# Altium PCB Board.PcbDoc (part 3 of 3)
Units mm, origin at the board's own origin, x right, y up, seen from the top; angles counter-clockwise.
Board outline 120 x 89 mm, 2 copper layers (Top Layer, Bottom Layer); 165 components, 194 nets, 816 pads, 265 vias.
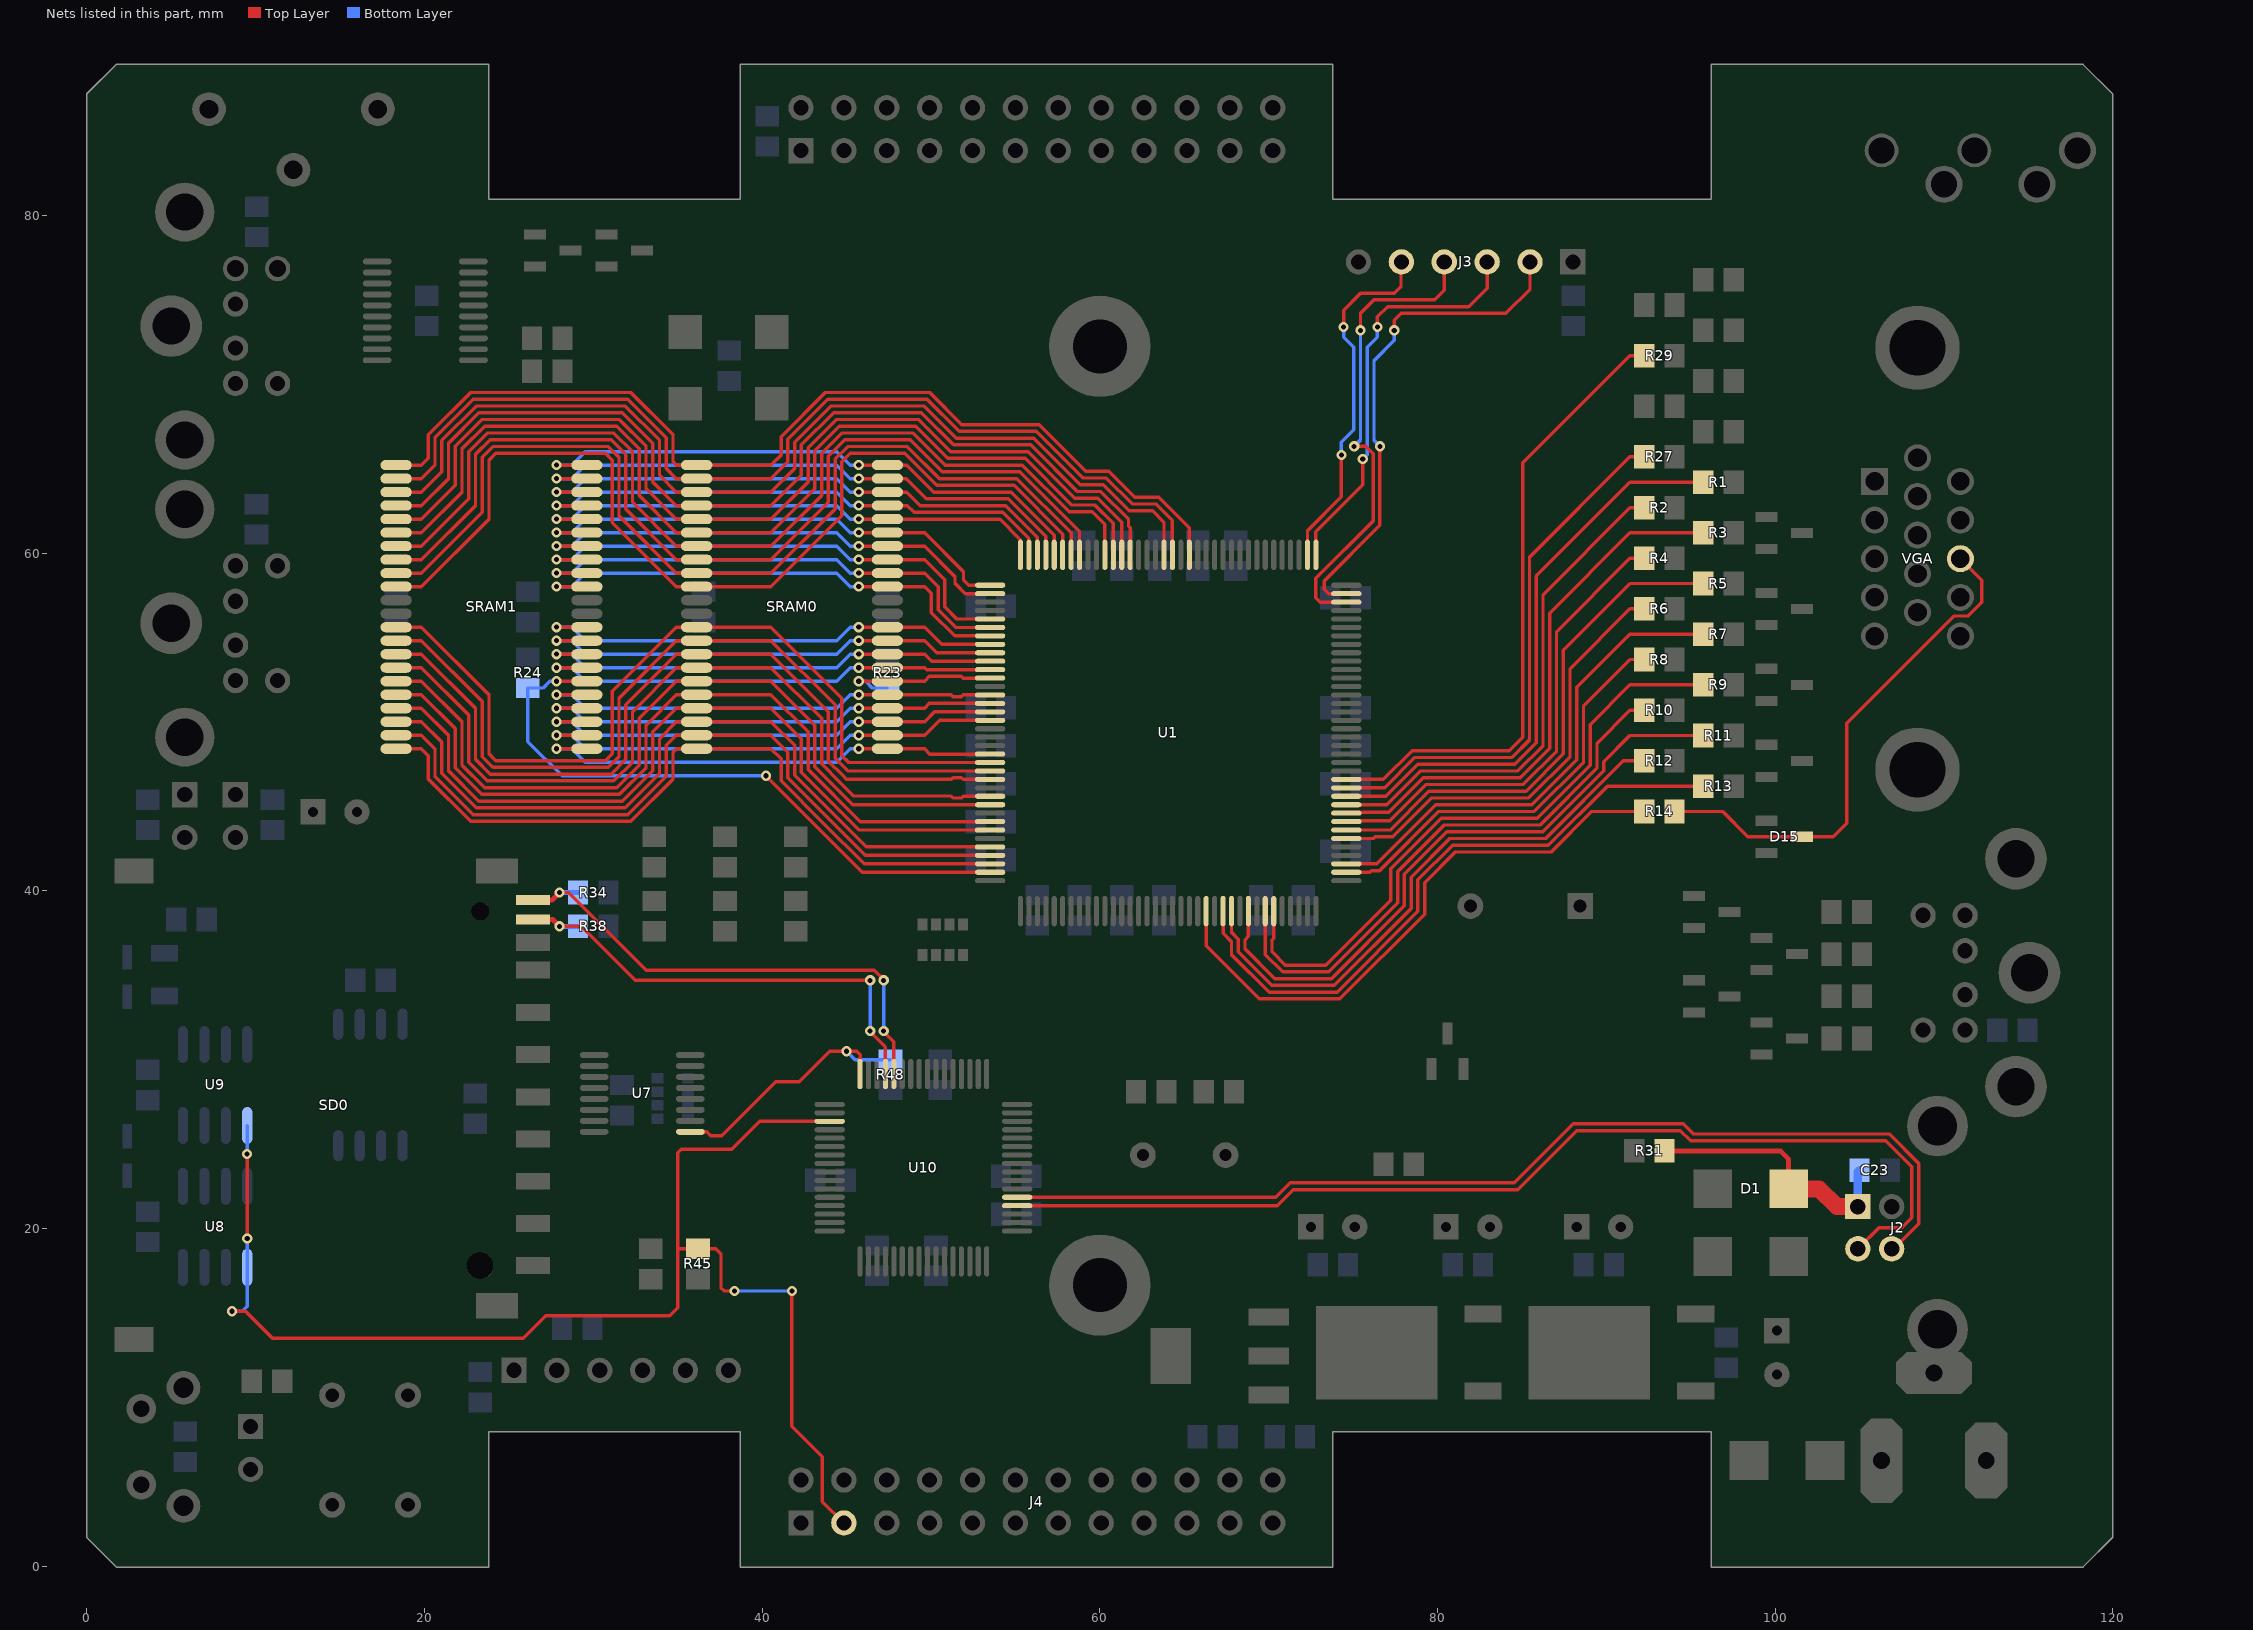
[diagram p3: the nets of this part, all layers, seen from the top]

## Via types
v1: diameter 0.6, hole 0.3, Top Layer to Bottom Layer, tented both sides, 246 vias
v2: diameter 1, hole 0.5, Top Layer to Bottom Layer, tented both sides, 18 vias
v3: diameter 1.5, hole 0.8, Top Layer to Bottom Layer, tented both sides, 1 vias

## Nets (pads, with @x,y where several pads share a name; then routed paths per layer and width w, separated by ;. In a path a pad name is that pad's centre, name@x,y a point inside that pad or via, vN(x,y) a via of type N, cw(c..) or ccw(c..) an arc to the next point about the centre after c; other vN are vias at no path point) (continued)
SDA: J4.3 R45.1 U8.5 U9.5 U10.3 | length 82.5
  Top Layer w0.2: v1(8.6,15.1) 9.4,15.1 11,13.5 25.856,13.5 27.181,14.825 34.525,14.825 35,15.3 35,18.8 ; v1(9.495,24.405) 9.505,24.405 v1(9.505,19.405) ; v1(38.36,16.3) 37.76,16.3 37.56,16.5 37.56,18.5 37.26,18.8 R45.1@36.2,18.8 35,18.8 ; v1(41.76,16.3) 41.76,8.3 43.57,6.49 43.57,3.83 J4.3@44.84,2.56 ; U10.3@44,26.35 39.85,26.35 38.2,24.7 35.2,24.7 35,24.5 35,18.8
  Bottom Layer w0.2: v1(8.6,15.1) 9.2,15.1 9.505,15.405 U8.5@9.505,17.7 v1(9.505,19.405) ; v1(9.495,24.405) 9.505,24.415 U9.5@9.505,26.1 ; v1(38.36,16.3) v1(41.76,16.3)
SDCD: R38.2 SD0.10 U10.61 | length 28.5
  Top Layer w0.2: v1(28,37.9) 29.29,37.9 32.49,34.7 v1(46.4,34.7) ; v1(46.4,31.7) 46.4,31.651 47.3,30.751 U10.61@47.3,29.15
  Top Layer w0.3: SD0.10@26.425,38.3 27.6,38.3 v1(28,37.9)
  Bottom Layer w0.2: v1(46.4,31.7) v1(46.4,34.7)
  Bottom Layer w0.3: v1(28,37.9) R38.2@29.1,37.9
SDWP: R34.2 SD0.11 U10.60 | length 30
  Top Layer w0.2: v1(28,39.9) 28.54,39.9 33.14,35.3 46.649,35.3 47.2,34.749 v1(47.2,34.7) ; v1(47.2,31.7) 47.2,31.651 47.8,31.051 U10.60@47.8,29.15
  Top Layer w0.3: SD0.11@26.425,39.45 27.55,39.45 v1(28,39.9)
  Bottom Layer w0.2: v1(47.2,31.7) v1(47.2,34.7)
  Bottom Layer w0.3: v1(28,39.9) R34.2@29.1,39.9
SOUND_L: R27.1 U1.84 | length 32.2
  Top Layer w0.2: U1.84@74.65,46.05 U1.84@74.6,46.1 76.866,46.1 78.666,47.9 84.416,47.9 85.45,48.934 85.45,59.759 91.39,65.7 R27.1@92.24,65.7
SOUND_R: R29.1 U1.85 | length 37.6
  Top Layer w0.2: U1.85@74.6,46.6 76.8,46.6 78.5,48.3 84.25,48.3 85.05,49.1 85.05,65.359 91.39,71.7 R29.1@92.24,71.7
SPI_MUX: R48.2 U7.1 U10.64 | length 16.3
  Top Layer w0.2: U7.1@35.75,25.725 36.729,25.725 36.951,25.502 37.602,25.502 40.8,28.7 42.2,28.7 44,30.5 v1(45,30.5) 45.6,30.5 45.8,30.3 U10.64@45.8,29.15
  Bottom Layer w0.2: v1(45,30.5) 45.5,30 R48.2@47.6,30
SRAM_A0: SRAM0.5 SRAM1.5 U1.14 | length 28.2
  Top Layer w0.2: v1(27.823,51.614) SRAM1.5@29.623,51.614 ; v1(45.723,51.614) SRAM0.5@47.423,51.614 51.187,51.614 51.301,51.5 51.799,51.5 51.913,51.614 53.486,51.614 U1.14@53.5,51.6
  Bottom Layer w0.2: v1(27.823,51.614) 28.723,51.614 29.523,50.814 44.423,50.814 45.223,51.614 v1(45.723,51.614)
SRAM_A1: SRAM0.4 SRAM1.4 U1.15 | length 28.3
  Top Layer w0.2: v1(27.823,50.814) SRAM1.4@29.623,50.814 ; v1(45.723,50.814) SRAM0.4@47.423,50.814 49.623,50.814 49.909,51.1 U1.15@53.5,51.1
  Bottom Layer w0.2: v1(27.823,50.814) 28.723,50.814 29.523,50.014 44.423,50.014 45.223,50.814 v1(45.723,50.814)
SRAM_A2: SRAM0.3 SRAM1.3 U1.16 | length 28.4
  Top Layer w0.2: v1(27.823,50.014) SRAM1.3@29.623,50.014 ; v1(45.723,50.014) SRAM0.3@47.423,50.014 49.623,50.014 50.209,50.6 U1.16@53.5,50.6
  Bottom Layer w0.2: v1(27.823,50.014) 28.723,50.014 29.523,49.214 44.423,49.214 45.223,50.014 v1(45.723,50.014)
SRAM_A3: SRAM0.2 SRAM1.2 U1.17 | length 28.5
  Top Layer w0.2: v1(27.823,49.214) SRAM1.2@29.623,49.214 ; v1(45.723,49.214) SRAM0.2@47.423,49.214 49.623,49.214 50.509,50.1 U1.17@53.5,50.1
  Bottom Layer w0.2: v1(27.823,49.214) 28.723,49.214 29.523,48.414 44.423,48.414 45.223,49.214 v1(45.723,49.214)
SRAM_A4: SRAM0.1 SRAM1.1 U1.21 | length 28.3
  Top Layer w0.2: v1(27.823,48.414) SRAM1.1@29.623,48.414 ; v1(45.723,48.414) SRAM0.1@47.423,48.414 49.623,48.414 49.937,48.1 U1.21@53.5,48.1
  Bottom Layer w0.2: v1(27.823,48.414) 28.723,48.414 29.523,47.614 44.423,47.614 45.223,48.414 v1(45.723,48.414)
SRAM_A5: SRAM0.44 SRAM1.44 U1.34 | length 44.1
  Top Layer w0.2: SRAM1.44@18.323,48.414 19.823,48.414 20.223,48.014 20.223,46.623 22.732,44.114 29.888,44.114 32.214,44.114 34.723,46.623 34.723,48.214 34.923,48.414 SRAM0.44@36.123,48.414 40.523,48.414 41.123,47.814 41.123,47.414 41.123,46.523 43.632,44.014 46.046,41.6 U1.34@53.5,41.6
SRAM_A6: SRAM0.43 SRAM1.43 U1.33 | length 44.9
  Top Layer w0.2: SRAM1.43@18.323,49.214 19.823,49.214 20.623,48.414 20.623,46.789 22.897,44.514 29.723,44.514 32.048,44.514 34.323,46.789 34.323,48.614 34.923,49.214 SRAM0.43@36.123,49.214 40.523,49.214 41.523,48.214 41.523,47.714 41.523,46.689 46.112,42.1 U1.33@53.5,42.1
SRAM_A7: SRAM0.42 SRAM1.42 U1.32 | length 45.8
  Top Layer w0.2: SRAM1.42@18.323,50.014 19.823,50.014 21.023,48.814 21.023,46.954 23.063,44.914 29.523,44.914 31.883,44.914 33.923,46.954 33.923,49.014 34.923,50.014 SRAM0.42@36.123,50.014 40.523,50.014 41.923,48.614 41.923,48.114 41.923,46.854 46.177,42.6 U1.32@53.5,42.6
SRAM_A8: SRAM0.28 SRAM1.28 U1.133 | length 59
  Top Layer w0.2: SRAM1.28@18.323,61.214 19.823,61.214 22.223,63.614 22.223,66.177 23.56,67.514 31.386,67.514 32.723,66.177 32.723,63.414 34.923,61.214 SRAM0.28@36.123,61.214 40.523,61.214 43.123,63.814 43.123,66.077 44.56,67.514 49.102,67.514 51.002,65.614 55.582,65.614 58.346,62.85 59.714,62.85 60.8,61.764 U1.133@60.8,59.9
SRAM_A9: SRAM0.27 SRAM1.27 U1.132 | length 58.8
  Top Layer w0.2: SRAM1.27@18.323,62.014 19.823,62.014 21.823,64.014 21.823,66.343 23.394,67.914 31.551,67.914 33.123,66.343 33.123,65.814 33.123,63.814 34.923,62.014 40.523,62.014 42.723,64.214 42.723,66.243 44.394,67.914 49.268,67.914 51.168,66.014 55.747,66.014 58.512,63.25 59.88,63.25 61.3,61.83 U1.132@61.3,59.9
SRAM_A10: SRAM0.26 SRAM1.26 U1.131 | length 58.6
  Top Layer w0.2: SRAM1.26@18.323,62.814 19.823,62.814 21.423,64.414 21.423,66.508 23.229,68.314 31.717,68.314 33.523,66.508 33.523,64.214 34.923,62.814 SRAM0.26@36.123,62.814 40.523,62.814 42.323,64.614 42.323,66.408 44.229,68.314 49.434,68.314 51.334,66.414 55.913,66.414 58.677,63.65 60.046,63.65 61.7,61.996 61.7,61.601 61.8,61.501 U1.131@61.8,59.9
SRAM_A11: SRAM0.25 SRAM1.25 U1.127 | length 59.8
  Top Layer w0.2: SRAM1.25@18.323,63.614 19.823,63.614 21.023,64.814 21.023,66.674 23.063,68.714 28.223,68.714 31.883,68.714 33.923,66.674 33.923,64.614 34.923,63.614 SRAM0.25@36.123,63.614 40.523,63.614 41.923,65.014 41.923,66.574 44.063,68.714 49.599,68.714 51.499,66.814 56.079,66.814 58.843,64.05 60.211,64.05 61.747,62.514 63.123,62.514 63.8,61.837 U1.127@63.8,59.9
SRAM_A12: SRAM0.24 SRAM1.24 U1.126 | length 59.6
  Top Layer w0.2: SRAM1.24@18.323,64.414 19.823,64.414 20.623,65.214 20.623,66.84 22.897,69.114 32.048,69.114 34.323,66.84 34.323,65.814 34.323,65.014 34.923,64.414 SRAM0.24@36.123,64.414 40.523,64.414 41.523,65.414 41.523,66.74 43.897,69.114 49.765,69.114 51.665,67.214 56.244,67.214 59.009,64.45 60.377,64.45 61.913,62.914 63.323,62.914 64.3,61.937 U1.126@64.3,59.9
SRAM_A13: SRAM0.23 SRAM1.23 U1.124 | length 59.6
  Top Layer w0.2: SRAM1.23@18.323,65.214 19.823,65.214 20.223,65.614 20.223,65.914 20.223,67.005 22.732,69.514 32.214,69.514 34.723,67.005 34.723,65.414 34.923,65.214 SRAM0.23@36.123,65.214 40.523,65.214 41.123,65.814 41.123,66.905 43.732,69.514 48.142,69.514 49.931,69.514 51.831,67.614 56.41,67.614 59.174,64.85 60.543,64.85 62.078,63.314 63.488,63.314 65.3,61.503 U1.124@65.3,59.9
SRAM_A14: SRAM0.22 SRAM1.22 U1.140 | length 34.8
  Top Layer w0.2: v1(27.823,65.214) SRAM1.22@29.623,65.214 ; v1(45.723,65.214) SRAM0.22@47.423,65.214 48.574,65.214 50.174,63.614 54.753,63.614 57.3,61.067 U1.140@57.3,59.9
  Bottom Layer w0.2: v1(27.823,65.214) 28.723,65.214 29.523,66.014 44.423,66.014 45.223,65.214 v1(45.723,65.214)
SRAM_A15: SRAM0.21 SRAM1.21 U1.141 | length 34
  Top Layer w0.2: v1(27.823,64.414) SRAM1.21@29.623,64.414 ; v1(45.723,64.414) SRAM0.21@47.423,64.414 48.532,64.414 49.732,63.214 54.588,63.214 56.8,61.002 U1.141@56.8,59.9
  Bottom Layer w0.2: v1(27.823,64.414) 28.723,64.414 29.523,65.214 44.423,65.214 45.223,64.414 v1(45.723,64.414)
SRAM_A16: SRAM0.20 SRAM1.20 U1.142 | length 33.1
  Top Layer w0.2: v1(27.823,63.614) SRAM1.20@29.623,63.614 ; v1(45.723,63.614) SRAM0.20@47.423,63.614 48.57,63.614 49.37,62.814 54.422,62.814 56.3,60.936 U1.142@56.3,59.9
  Bottom Layer w0.2: v1(27.823,63.614) 28.723,63.614 29.523,64.414 44.423,64.414 45.223,63.614 v1(45.723,63.614)
SRAM_A17: SRAM0.19 SRAM1.19 U1.143 | length 32.2
  Top Layer w0.2: v1(27.823,62.814) SRAM1.19@29.623,62.814 ; v1(45.723,62.814) SRAM0.19@47.423,62.814 48.608,62.814 49.008,62.414 54.256,62.414 55.8,60.87 U1.143@55.8,59.9
  Bottom Layer w0.2: v1(27.823,62.814) 28.723,62.814 29.523,63.614 44.423,63.614 45.223,62.814 v1(45.723,62.814)
SRAM_A18: SRAM0.18 SRAM1.18 U1.144 | length 31.3
  Top Layer w0.2: v1(27.823,62.014) SRAM1.18@29.623,62.014 ; v1(45.723,62.014) SRAM0.18@47.423,62.014 54.091,62.014 55.3,60.805 U1.144@55.3,59.9
  Bottom Layer w0.2: v1(27.823,62.014) 28.723,62.014 29.523,62.814 44.423,62.814 45.223,62.014 v1(45.723,62.014)
SRAM_CE0: R23.2 SRAM0.6 U1.12 | length 9.8
  Top Layer w0.2: v1(45.723,52.414) SRAM0.6@47.423,52.414 49.623,52.414 49.909,52.7 51.799,52.7 51.899,52.6 U1.12@53.5,52.6
  Bottom Layer w0.2: v1(45.723,52.414) 46.123,52.414 46.523,52.014 R23.2@47.423,52.014
SRAM_CE1: R24.2 SRAM1.6 U1.35 | length 37.4
  Top Layer w0.2: v1(27.823,52.414) SRAM1.6@29.623,52.414 ; v1(40.223,46.814) 43.423,43.614 45.937,41.1 U1.35@53.5,41.1
  Bottom Layer w0.2: v1(27.823,52.414) 27.423,52.414 27.023,52.014 R24.2@26.123,52.014 26.123,48.842 28.15,46.814 v1(40.223,46.814)
SRAM_D0: SRAM0.7 SRAM1.7 U1.11 | length 28.2
  Top Layer w0.2: v1(27.823,53.214) SRAM1.7@29.623,53.214 ; v1(45.723,53.214) SRAM0.7@47.423,53.214 49.623,53.214 49.737,53.1 U1.11@53.5,53.1
  Bottom Layer w0.2: v1(27.823,53.214) 28.723,53.214 29.523,52.414 44.423,52.414 45.223,53.214 v1(45.723,53.214)
SRAM_D1: SRAM0.8 SRAM1.8 U1.10 | length 28.3
  Top Layer w0.2: v1(27.823,54.014) SRAM1.8@29.623,54.014 ; v1(45.723,54.014) SRAM0.8@47.423,54.014 49.623,54.014 50.037,53.6 U1.10@53.5,53.6
  Bottom Layer w0.2: v1(27.823,54.014) 28.723,54.014 29.523,53.214 44.423,53.214 45.223,54.014 v1(45.723,54.014)
SRAM_D2: SRAM0.9 SRAM1.9 U1.9 | length 28.4
  Top Layer w0.2: v1(27.823,54.814) SRAM1.9@29.623,54.814 ; v1(45.723,54.814) SRAM0.9@47.423,54.814 49.623,54.814 50.337,54.1 U1.9@53.5,54.1
  Bottom Layer w0.2: v1(27.823,54.814) 28.723,54.814 29.523,54.014 44.423,54.014 45.223,54.814 v1(45.723,54.814)
SRAM_D3: SRAM0.10 SRAM1.10 U1.8 | length 28.6
  Top Layer w0.2: v1(27.823,55.614) SRAM1.10@29.623,55.614 ; v1(45.723,55.614) SRAM0.10@47.423,55.614 49.623,55.614 50.637,54.6 U1.8@53.5,54.6
  Bottom Layer w0.2: v1(27.823,55.614) 28.723,55.614 29.523,54.814 44.423,54.814 45.223,55.614 v1(45.723,55.614)
SRAM_D4: SRAM0.13 SRAM1.13 U1.7 | length 30
  Top Layer w0.2: v1(27.823,58.014) SRAM1.13@29.623,58.014 ; v1(45.723,58.014) SRAM0.13@47.423,58.014 49.623,58.014 50.023,57.614 50.023,56.483 51.406,55.1 U1.7@53.5,55.1
  Bottom Layer w0.2: v1(27.823,58.014) 28.723,58.014 29.523,58.814 44.423,58.814 45.223,58.014 v1(45.723,58.014)
SRAM_D5: SRAM0.14 SRAM1.14 U1.6 | length 30.3
  Top Layer w0.2: v1(27.823,58.814) SRAM1.14@29.623,58.814 ; v1(45.723,58.814) SRAM0.14@47.423,58.814 49.623,58.814 50.423,58.014 50.423,56.649 51.471,55.6 U1.6@53.5,55.6
  Bottom Layer w0.2: v1(27.823,58.814) 28.723,58.814 29.523,59.614 44.423,59.614 45.223,58.814 v1(45.723,58.814)
SRAM_D6: SRAM0.15 SRAM1.15 U1.5 | length 30.5
  Top Layer w0.2: v1(27.823,59.614) SRAM1.15@29.623,59.614 ; v1(45.723,59.614) SRAM0.15@47.423,59.614 49.623,59.614 50.823,58.414 50.823,56.814 51.537,56.1 U1.5@53.5,56.1
  Bottom Layer w0.2: v1(27.823,59.614) 28.723,59.614 29.523,60.414 44.423,60.414 45.223,59.614 v1(45.723,59.614)
SRAM_D7: SRAM0.16 SRAM1.16 U1.2 | length 29.5
  Top Layer w0.2: v1(27.823,60.414) SRAM1.16@29.623,60.414 ; v1(45.723,60.414) SRAM0.16@47.423,60.414 49.623,60.414 51.423,58.614 51.423,58.214 52.037,57.6 U1.2@53.5,57.6
  Bottom Layer w0.2: v1(27.823,60.414) 28.723,60.414 29.523,61.214 44.423,61.214 45.223,60.414 v1(45.723,60.414)
SRAM_D8: SRAM0.29 SRAM1.29 U1.134 | length 59.2
  Top Layer w0.2: SRAM1.29@18.323,60.414 19.823,60.414 22.623,63.214 22.623,66.011 23.726,67.114 31.22,67.114 32.323,66.011 32.323,63.014 34.923,60.414 SRAM0.29@36.123,60.414 40.523,60.414 43.523,63.414 43.523,65.911 44.726,67.114 48.937,67.114 50.837,65.214 55.416,65.214 58.18,62.45 59.549,62.45 60.3,61.699 U1.134@60.3,59.9
SRAM_D9: SRAM0.30 SRAM1.30 U1.137 | length 58.2
  Top Layer w0.2: SRAM1.30@18.323,59.614 19.823,59.614 23.023,62.814 23.023,65.846 23.891,66.714 31.054,66.714 31.923,65.846 31.923,62.614 34.923,59.614 SRAM0.30@36.123,59.614 40.523,59.614 43.923,63.014 43.923,65.746 44.891,66.714 48.771,66.714 50.671,64.814 55.25,64.814 58.8,61.265 U1.137@58.8,59.9
SRAM_D10: SRAM0.31 SRAM1.31 U1.138 | length 58.4
  Top Layer w0.2: SRAM1.31@18.323,58.814 19.823,58.814 23.423,62.414 23.423,65.68 24.057,66.314 30.888,66.314 31.523,65.68 31.523,63.414 31.523,62.214 34.923,58.814 SRAM0.31@36.123,58.814 40.523,58.814 44.323,62.614 44.323,65.58 45.057,66.314 48.605,66.314 50.505,64.414 55.085,64.414 58.3,61.199 U1.138@58.3,59.9
SRAM_D11: SRAM0.32 SRAM1.32 U1.139 | length 58.6
  Top Layer w0.2: SRAM1.32@18.323,58.014 19.823,58.014 23.823,62.014 23.823,65.514 24.223,65.914 30.723,65.914 31.123,65.514 31.123,61.814 34.923,58.014 SRAM0.32@36.123,58.014 40.523,58.014 44.723,62.214 44.723,65.414 45.223,65.914 48.44,65.914 50.34,64.014 54.919,64.014 57.8,61.133 U1.139@57.8,59.9
SRAM_D12: SRAM0.35 SRAM1.35 U1.22 | length 51.3
  Top Layer w0.2: SRAM1.35@18.323,55.614 19.823,55.614 23.823,51.614 23.823,48.114 24.223,47.714 30.723,47.714 31.123,48.114 31.123,51.814 34.923,55.614 SRAM0.35@36.123,55.614 40.523,55.614 44.723,51.414 44.723,48.014 45.137,47.6 U1.22@53.5,47.6
SRAM_D13: SRAM0.36 SRAM1.36 U1.23 | length 50.4
  Top Layer w0.2: SRAM1.36@18.323,54.814 19.823,54.814 23.423,51.214 23.423,47.949 24.057,47.314 30.888,47.314 31.523,47.949 31.523,51.414 34.923,54.814 SRAM0.36@36.123,54.814 40.523,54.814 44.323,51.014 44.323,47.849 45.071,47.1 U1.23@53.5,47.1
SRAM_D14: SRAM0.37 SRAM1.37 U1.24 | length 49.6
  Top Layer w0.2: SRAM1.37@18.323,54.014 19.823,54.014 23.023,50.814 23.023,47.783 23.891,46.914 31.054,46.914 31.923,47.783 31.923,51.014 34.923,54.014 SRAM0.37@36.123,54.014 40.523,54.014 43.923,50.614 43.923,47.683 44.791,46.814 44.991,46.614 51.216,46.614 51.301,46.7 51.799,46.7 51.899,46.6 U1.24@53.5,46.6
SRAM_D15: SRAM0.38 SRAM1.38 U1.26 | length 48.9
  Top Layer w0.2: SRAM1.38@18.323,53.214 19.823,53.214 22.623,50.414 22.623,47.617 23.726,46.514 28.823,46.514 31.22,46.514 32.323,47.617 32.323,50.614 34.923,53.214 SRAM0.38@36.123,53.214 40.523,53.214 43.523,50.214 43.523,49.614 43.523,47.517 44.626,46.414 ; 44.667,46.373 45.426,45.614 51.187,45.614 51.301,45.5 51.813,45.5 51.913,45.6 U1.26@53.5,45.6
SRAM_LB: SRAM0.39 SRAM1.39 U1.27 | length 48
  Top Layer w0.2: SRAM1.39@18.323,52.414 19.823,52.414 22.223,50.014 22.223,47.452 23.56,46.114 31.386,46.114 32.723,47.452 32.723,50.214 34.923,52.414 SRAM0.39@36.123,52.414 40.523,52.414 43.123,49.814 43.123,49.314 43.123,47.352 45.374,45.1 U1.27@53.5,45.1
SRAM_OE: SRAM0.41 SRAM1.41 U1.30 | length 46.5
  Top Layer w0.2: SRAM1.41@18.323,50.814 19.823,50.814 21.423,49.214 21.423,47.12 23.229,45.314 31.717,45.314 33.523,47.12 33.523,49.414 34.923,50.814 SRAM0.41@36.123,50.814 40.523,50.814 42.323,49.014 42.323,48.414 42.323,47.02 44.129,45.214 45.743,43.6 U1.30@53.5,43.6
SRAM_UB: SRAM0.40 SRAM1.40 U1.29 | length 47.3
  Top Layer w0.2: SRAM1.40@18.323,51.614 19.823,51.614 21.823,49.614 21.823,47.286 23.394,45.714 31.551,45.714 33.123,47.286 33.123,47.714 33.123,49.814 34.923,51.614 SRAM0.40@36.123,51.614 40.523,51.614 42.723,49.414 42.723,48.714 42.723,47.186 45.809,44.1 U1.29@53.5,44.1
SRAM_WE: SRAM0.17 SRAM1.17 U1.1 | length 29.7
  Top Layer w0.2: v1(27.823,61.214) SRAM1.17@29.623,61.214 ; v1(45.723,61.214) SRAM0.17@47.423,61.214 49.623,61.214 51.923,58.914 51.923,58.414 52.237,58.1 U1.1@53.5,58.1
  Bottom Layer w0.2: v1(27.823,61.214) 28.723,61.214 29.523,62.014 44.423,62.014 45.223,61.214 v1(45.723,61.214)
TCK: J3.3 U1.109 | length 24.4
  Top Layer w0.2: U1.109@72.8,59.9 72.8,61.268 75.574,64.042 v1(75.574,65.566) ; v1(76.44,73.4) 76.44,74 77.04,74.6 81.84,74.6 82.94,75.7 J3.3@82.94,77.25
  Bottom Layer w0.2: v1(75.574,65.566) 75.84,65.832 75.84,72.2 76.44,72.8 v1(76.44,73.4)
TDI: J3.5 U1.110 | length 21.3
  Top Layer w0.2: U1.110@72.3,59.9 72.3,61.334 74.304,63.338 v1(74.304,65.82) ; v1(74.44,73.4) 74.44,74.4 75.44,75.4 77.44,75.4 77.84,75.8 77.84,77.23 J3.5@77.86,77.25
  Bottom Layer w0.2: v1(74.304,65.82) 74.304,66.582 75.04,67.318 75.04,72.2 74.44,72.8 v1(74.44,73.4)
TDO: J3.4 U1.106 | length 28.4
  Top Layer w0.2: U1.106@74.6,57.1 73.05,57.1 72.8,57.35 72.8,58.514 76.19,61.904 76.19,65.879 75.741,66.328 v1(75.066,66.328) ; v1(75.44,73.2) 75.44,74.2 76.24,75 79.84,75 80.4,75.56 J3.4@80.4,77.25
  Bottom Layer w0.2: v1(75.066,66.328) 75.44,66.702 v1(75.44,73.2)
TMS: J3.2 U1.107 | length 29.8
  Top Layer w0.2: U1.107@74.6,57.6 73.55,57.6 73.3,57.85 73.3,58.35 76.59,61.64 v1(76.59,66.328) ; v1(77.44,73.2) 77.44,73.8 77.84,74.2 84.04,74.2 85.48,75.64 J3.2@85.48,77.25
  Bottom Layer w0.2: v1(76.59,66.328) 76.24,66.678 76.24,71.4 77.44,72.6 v1(77.44,73.2)
USB_D+: J2.3 U10.37 | length 62
  Top Layer w0.2: U10.37@55.1,21.85 70.419,21.85 71.269,22.7 84.551,22.7 88.051,26.2 94.556,26.2 95.156,25.6 106.75,25.6 108.5,23.85 108.5,20.284 107.016,18.8 J2.3@106.9,18.8
USB_D-: J2.2 U10.36 | length 62.7
  Top Layer w0.2: U10.36@55.1,21.35 70.5,21.35 71.45,22.3 84.75,22.3 88.25,25.8 94.39,25.8 94.99,25.2 106.55,25.2 108.1,23.65 108.1,20.65 107.5,20.05 106.15,20.05 J2.2@104.9,18.8
VBUS: C23.2 D1.1 J2.1 R31.1 | length 16
  Top Layer w0.3: R31.1@93.45,24.6 100.3,24.6 100.8,24.1 D1.1@100.8,22.35
  Top Layer w1: D1.1@100.8,22.35 102.6,22.35 103.65,21.3 J2.1@104.9,21.3
  Bottom Layer w0.5: J2.1@104.9,21.3 104.9,23.35 C23.2@105,23.45
VGA_B0: R12.2 U1.62 | length 34
  Top Layer w0.2: U1.62@67.8,38.8 67.8,37.54 68.2,37.14 68.2,36.39 70.19,34.4 73.887,34.4 78.44,38.953 78.44,40.813 80.727,43.1 86.404,43.1 91.004,47.7 R12.2@92.24,47.7
VGA_B1: R11.2 U1.64 | length 37.6
  Top Layer w0.2: U1.64@68.8,38.8 68.8,37.299 68.6,37.099 68.6,36.556 70.356,34.8 73.722,34.8 78.04,39.118 78.04,40.979 80.561,43.5 86.238,43.5 89.85,47.112 89.85,47.65 91.4,49.2 R11.2@95.74,49.2
VGA_B2: R10.2 U1.66 | length 33.8
  Top Layer w0.2: U1.66@69.8,38.8 69.8,36.224 70.824,35.2 73.556,35.2 77.64,39.284 77.64,41.144 80.396,43.9 86.073,43.9 89.45,47.278 89.45,48.75 91.4,50.7 R10.2@92.24,50.7
VGA_B3: R9.2 U1.67 | length 37.7
  Top Layer w0.2: U1.67@70.3,38.8 70.3,37.199 70.2,37.099 70.2,36.39 70.99,35.6 73.39,35.6 77.24,39.45 77.24,41.31 80.23,44.3 85.907,44.3 89.05,47.444 89.05,49.85 91.4,52.2 R9.2@95.74,52.2
VGA_G0: R8.2 U1.74 | length 24.8
  Top Layer w0.2: U1.74@74.6,41.1 75.99,41.1 76.09,41.2 76.564,41.2 80.064,44.7 85.741,44.7 88.65,47.609 88.65,49.556 88.65,50.95 91.4,53.7 R8.2@92.24,53.7
VGA_G1: R7.2 U1.75 | length 29.3
  Top Layer w0.2: U1.75@74.6,41.6 76.399,41.6 79.899,45.1 85.575,45.1 88.25,47.775 88.25,49.389 88.25,52.05 91.39,55.19 95.731,55.19 R7.2@95.74,55.2
VGA_G2: R6.2 U1.78 | length 26.3
  Top Layer w0.2: U1.78@74.6,43.1 76.201,43.1 76.301,43.2 77.36,43.2 79.66,45.5 85.41,45.5 87.85,47.94 87.85,53.15 91.4,56.7 R6.2@92.24,56.7
VGA_G3: R5.2 U1.79 | length 30.8
  Top Layer w0.2: U1.79@74.6,43.6 77.194,43.6 79.494,45.9 85.244,45.9 87.45,48.106 87.45,54.25 91.4,58.2 R5.2@95.74,58.2
VGA_HS: R13.2 U1.61 | length 37.8
  Top Layer w0.2: U1.61@67.3,38.8 67.3,37.474 67.8,36.974 67.8,36.224 70.024,34 74.053,34 78.84,38.787 78.84,40.647 80.893,42.7 86.57,42.7 90.069,46.2 R13.2@95.74,46.2
VGA_R0: R4.2 U1.80 | length 28.2
  Top Layer w0.2: U1.80@74.6,44.1 74.65,44.15 77.178,44.15 79.328,46.3 85.078,46.3 87.05,48.272 87.05,55.35 91.4,59.7 R4.2@92.24,59.7
VGA_R1: R3.2 U1.81 | length 32.7
  Top Layer w0.2: U1.81@74.6,44.6 74.65,44.65 77.113,44.65 79.163,46.7 84.913,46.7 86.65,48.437 86.65,56.45 91.4,61.2 R3.2@95.74,61.2
VGA_R2: R2.2 U1.82 | length 30.2
  Top Layer w0.2: U1.82@74.6,45.1 76.997,45.1 78.997,47.1 84.747,47.1 86.25,48.603 86.25,57.55 91.4,62.7 R2.2@92.24,62.7
VGA_R3: R1.2 U1.83 | length 34.6
  Top Layer w0.2: U1.83@74.6,45.6 76.931,45.6 78.831,47.5 84.581,47.5 85.85,48.769 85.85,58.65 91.4,64.2 R1.2@95.74,64.2
VGA_VS: R14.2 U1.59 | length 35
  Top Layer w0.2: U1.59@66.3,38.8 66.3,36.751 69.451,33.6 74.219,33.6 79.24,38.621 79.24,40.482 81.058,42.3 86.735,42.3 89.135,44.7 R14.2@92.24,44.7
VSYNC: D15.3 R14.1 VGA.13 | length 31.1
  Top Layer w0.2: R14.1@94.04,44.7 96.881,44.7 98.381,43.2 D15.3@101.59,43.2 103.45,43.2 104.24,43.99 104.24,49.915 110.605,56.28 111.426,56.28 112.24,57.094 112.24,58.4 VGA.13@110.97,59.67
pads on no net: "Gamepad 1.1" "Gamepad 2.1" Audio.4 Audio.5 J5.6 Power.MH R26.1 SD0.0 SD0.8 SD0.9 U1.72 U5.7 U5.9 U5.16 U5.18 U9.7 VGA.4 VGA.9 VGA.11 VGA.12 VGA.15

## Polygon pours and split planes (outlines as drawn)
GND on Bottom Layer "Bottom Layer-No Net" (solid, remove dead copper, pour order 2): -0.022,88.978 -0.022,-0.022 23.778,-0.022 23.778,7.978 38.678,7.978 38.678,-0.022 73.778,-0.022 73.778,7.978 96.178,7.978 96.178,-0.022 119.978,-0.022 119.978,88.978 96.178,88.978 96.178,80.978 73.778,80.978 73.778,88.978 38.678,88.978 38.678,80.978 23.778,80.978 23.778,88.978

## Keep-outs
Keep-Out Layer:
  the board outline again, w0.15

## Other copper
Top Layer:
  region: 73.684,24.934 73.668,24.934 73.668,24.884 73.651,24.884 73.651,24.868 73.634,24.868 73.634,24.834 73.618,24.834 73.618,24.818 73.601,24.818 73.601,24.801 73.568,24.801 73.568,24.784 73.551,24.784 73.551,24.768 73.501,24.768 73.501,24.751 73.368,24.751 73.368,24.768 73.318,24.768 73.318,24.784 73.301,24.784 73.301,24.801 73.268,24.801 73.268,24.818 73.251,24.818 73.251,24.834 73.234,24.834 73.234,24.868 73.218,24.868 73.218,24.884 73.201,24.884 73.201,24.934 73.184,24.934 73.184,25.751 73.684,25.751
  region: 74.684,24.934 74.667,24.934 74.667,24.884 74.651,24.884 74.651,24.868 74.634,24.868 74.634,24.834 74.617,24.834 74.617,24.818 74.601,24.818 74.601,24.801 74.567,24.801 74.567,24.784 74.551,24.784 74.551,24.768 74.501,24.768 74.501,24.751 74.367,24.751 74.367,24.768 74.317,24.768 74.317,24.784 74.301,24.784 74.301,24.801 74.267,24.801 74.267,24.818 74.251,24.818 74.251,24.834 74.234,24.834 74.234,24.868 74.217,24.868 74.217,24.884 74.201,24.884 74.201,24.934 74.184,24.934 74.184,25.751 74.684,25.751
  region: 75.7,24.934 75.683,24.934 75.683,24.884 75.667,24.884 75.667,24.868 75.65,24.868 75.65,24.834 75.633,24.834 75.633,24.818 75.617,24.818 75.617,24.801 75.583,24.801 75.583,24.784 75.567,24.784 75.567,24.768 75.517,24.768 75.517,24.751 75.384,24.751 75.384,24.768 75.334,24.768 75.334,24.784 75.317,24.784 75.317,24.801 75.284,24.801 75.284,24.818 75.267,24.818 75.267,24.834 75.25,24.834 75.25,24.868 75.234,24.868 75.234,24.884 75.217,24.884 75.217,24.934 75.2,24.934 75.2,25.751 75.7,25.751
  region: 76.716,24.934 76.7,24.934 76.7,24.884 76.683,24.884 76.683,24.868 76.666,24.868 76.666,24.834 76.65,24.834 76.65,24.818 76.633,24.818 76.633,24.801 76.6,24.801 76.6,24.784 76.583,24.784 76.583,24.768 76.533,24.768 76.533,24.751 76.4,24.751 76.4,24.768 76.35,24.768 76.35,24.784 76.333,24.784 76.333,24.801 76.3,24.801 76.3,24.818 76.283,24.818 76.283,24.834 76.267,24.834 76.267,24.868 76.25,24.868 76.25,24.884 76.233,24.884 76.233,24.934 76.217,24.934 76.217,25.751 76.716,25.751
  region: 72.518,26.45 71.702,26.45 71.702,26.467 71.652,26.467 71.652,26.484 71.635,26.484 71.635,26.5 71.602,26.5 71.602,26.517 71.585,26.517 71.585,26.534 71.568,26.534 71.568,26.567 71.552,26.567 71.552,26.584 71.535,26.584 71.535,26.634 71.518,26.634 71.518,26.767 71.535,26.767 71.535,26.817 71.552,26.817 71.552,26.833 71.568,26.833 71.568,26.867 71.585,26.867 71.585,26.883 71.602,26.883 71.602,26.9 71.635,26.9 71.635,26.917 71.652,26.917 71.652,26.933 71.702,26.933 71.702,26.95 72.518,26.95
  region: 78.199,26.933 78.249,26.933 78.249,26.917 78.266,26.917 78.266,26.9 78.299,26.9 78.299,26.883 78.316,26.883 78.316,26.867 78.332,26.867 78.332,26.833 78.349,26.833 78.349,26.817 78.366,26.817 78.366,26.767 78.382,26.767 78.382,26.634 78.366,26.634 78.366,26.584 78.349,26.584 78.349,26.567 78.332,26.567 78.332,26.534 78.316,26.534 78.316,26.517 78.299,26.517 78.299,26.5 78.266,26.5 78.266,26.484 78.249,26.484 78.249,26.467 78.199,26.467 78.199,26.45 77.383,26.45 77.383,26.95 78.199,26.95
  region: 72.518,27.467 71.702,27.467 71.702,27.483 71.652,27.483 71.652,27.5 71.635,27.5 71.635,27.517 71.602,27.517 71.602,27.533 71.585,27.533 71.585,27.55 71.568,27.55 71.568,27.583 71.552,27.583 71.552,27.6 71.535,27.6 71.535,27.65 71.518,27.65 71.518,27.783 71.535,27.783 71.535,27.833 71.552,27.833 71.552,27.85 71.568,27.85 71.568,27.883 71.585,27.883 71.585,27.9 71.602,27.9 71.602,27.916 71.635,27.916 71.635,27.933 71.652,27.933 71.652,27.95 71.702,27.95 71.702,27.966 72.518,27.966
  region: 78.199,27.95 78.249,27.95 78.249,27.933 78.266,27.933 78.266,27.916 78.299,27.916 78.299,27.9 78.316,27.9 78.316,27.883 78.332,27.883 78.332,27.85 78.349,27.85 78.349,27.833 78.366,27.833 78.366,27.783 78.382,27.783 78.382,27.65 78.366,27.65 78.366,27.6 78.349,27.6 78.349,27.583 78.332,27.583 78.332,27.55 78.316,27.55 78.316,27.533 78.299,27.533 78.299,27.517 78.266,27.517 78.266,27.5 78.249,27.5 78.249,27.483 78.199,27.483 78.199,27.467 77.383,27.467 77.383,27.966 78.199,27.966
  region: 72.518,28.483 71.702,28.483 71.702,28.5 71.652,28.5 71.652,28.516 71.635,28.516 71.635,28.533 71.602,28.533 71.602,28.55 71.585,28.55 71.585,28.566 71.568,28.566 71.568,28.599 71.552,28.599 71.552,28.616 71.535,28.616 71.535,28.666 71.518,28.666 71.518,28.799 71.535,28.799 71.535,28.849 71.552,28.849 71.552,28.866 71.568,28.866 71.568,28.899 71.585,28.899 71.585,28.916 71.602,28.916 71.602,28.933 71.635,28.933 71.635,28.949 71.652,28.949 71.652,28.966 71.702,28.966 71.702,28.983 72.518,28.983
  region: 78.199,28.966 78.249,28.966 78.249,28.949 78.266,28.949 78.266,28.933 78.299,28.933 78.299,28.916 78.316,28.916 78.316,28.899 78.332,28.899 78.332,28.866 78.349,28.866 78.349,28.849 78.366,28.849 78.366,28.799 78.382,28.799 78.382,28.666 78.366,28.666 78.366,28.616 78.349,28.616 78.349,28.599 78.332,28.599 78.332,28.566 78.316,28.566 78.316,28.55 78.299,28.55 78.299,28.533 78.266,28.533 78.266,28.516 78.249,28.516 78.249,28.5 78.199,28.5 78.199,28.483 77.383,28.483 77.383,28.983 78.199,28.983
  region: 72.518,29.482 71.702,29.482 71.702,29.499 71.652,29.499 71.652,29.516 71.635,29.516 71.635,29.532 71.602,29.532 71.602,29.549 71.585,29.549 71.585,29.566 71.568,29.566 71.568,29.599 71.552,29.599 71.552,29.616 71.535,29.616 71.535,29.666 71.518,29.666 71.518,29.799 71.535,29.799 71.535,29.849 71.552,29.849 71.552,29.866 71.568,29.866 71.568,29.899 71.585,29.899 71.585,29.916 71.602,29.916 71.602,29.932 71.635,29.932 71.635,29.949 71.652,29.949 71.652,29.966 71.702,29.966 71.702,29.982 72.518,29.982
  region: 78.199,29.966 78.249,29.966 78.249,29.949 78.266,29.949 78.266,29.932 78.299,29.932 78.299,29.916 78.316,29.916 78.316,29.899 78.332,29.899 78.332,29.866 78.349,29.866 78.349,29.849 78.366,29.849 78.366,29.799 78.382,29.799 78.382,29.666 78.366,29.666 78.366,29.616 78.349,29.616 78.349,29.599 78.332,29.599 78.332,29.566 78.316,29.566 78.316,29.549 78.299,29.549 78.299,29.532 78.266,29.532 78.266,29.516 78.249,29.516 78.249,29.499 78.199,29.499 78.199,29.482 77.383,29.482 77.383,29.982 78.199,29.982
  region: 73.501,31.632 73.551,31.632 73.551,31.615 73.568,31.615 73.568,31.598 73.601,31.598 73.601,31.582 73.618,31.582 73.618,31.565 73.634,31.565 73.634,31.532 73.651,31.532 73.651,31.515 73.668,31.515 73.668,31.465 73.684,31.465 73.684,30.649 73.184,30.649 73.184,31.465 73.201,31.465 73.201,31.515 73.218,31.515 73.218,31.532 73.234,31.532 73.234,31.565 73.251,31.565 73.251,31.582 73.268,31.582 73.268,31.598 73.301,31.598 73.301,31.615 73.318,31.615 73.318,31.632 73.368,31.632 73.368,31.648 73.501,31.648
  region: 74.501,31.632 74.551,31.632 74.551,31.615 74.567,31.615 74.567,31.598 74.601,31.598 74.601,31.582 74.617,31.582 74.617,31.565 74.634,31.565 74.634,31.532 74.651,31.532 74.651,31.515 74.667,31.515 74.667,31.465 74.684,31.465 74.684,30.649 74.184,30.649 74.184,31.465 74.201,31.465 74.201,31.515 74.217,31.515 74.217,31.532 74.234,31.532 74.234,31.565 74.251,31.565 74.251,31.582 74.267,31.582 74.267,31.598 74.301,31.598 74.301,31.615 74.317,31.615 74.317,31.632 74.367,31.632 74.367,31.648 74.501,31.648
  region: 75.517,31.632 75.567,31.632 75.567,31.615 75.583,31.615 75.583,31.598 75.617,31.598 75.617,31.582 75.633,31.582 75.633,31.565 75.65,31.565 75.65,31.532 75.667,31.532 75.667,31.515 75.683,31.515 75.683,31.465 75.7,31.465 75.7,30.649 75.2,30.649 75.2,31.465 75.217,31.465 75.217,31.515 75.234,31.515 75.234,31.532 75.25,31.532 75.25,31.565 75.267,31.565 75.267,31.582 75.284,31.582 75.284,31.598 75.317,31.598 75.317,31.615 75.334,31.615 75.334,31.632 75.384,31.632 75.384,31.648 75.517,31.648
  region: 76.533,31.632 76.583,31.632 76.583,31.615 76.6,31.615 76.6,31.598 76.633,31.598 76.633,31.582 76.65,31.582 76.65,31.565 76.666,31.565 76.666,31.532 76.683,31.532 76.683,31.515 76.7,31.515 76.7,31.465 76.716,31.465 76.716,30.649 76.217,30.649 76.217,31.465 76.233,31.465 76.233,31.515 76.25,31.515 76.25,31.532 76.267,31.532 76.267,31.565 76.283,31.565 76.283,31.582 76.3,31.582 76.3,31.598 76.333,31.598 76.333,31.615 76.35,31.615 76.35,31.632 76.4,31.632 76.4,31.648 76.533,31.648
  region: 205 vertices and 1 holes, not listed, extent 72.668,25.917 77.25,30.499
  text "Top" at 96.99,86.7 h1.52
  text "OpenSource" at 89.3,79.1 h1.2
  text "Hardware" at 97.2,77.5 h1.2
  text "Aeon Lite" at 85,30.8 h0.9
  text "by" at 85,29.5 h0.9
  text "ILoveSpeccy" at 87.3,29.5 h0.9
  text "'2014" at 93,27.9 h0.8
Bottom Layer:
  pour cut-out: 2.99,29.7 3.03,29.74 7.53,29.74 8.235,30.445 8.235,38.065 8,38.3 2.59,38.3 2.24,37.95 2.24,29.95
  pour cut-out: 60.8,25.575 61.325,26.1 68.8,26.1 69.3,25.6 69.3,23.1 68.8,22.6 61.3,22.6 60.8,23.1
  text "Bottom" at 104.99,86.7 h1.52

## Silkscreen, mask and mechanical layers (free items; w line width, h text height)
Top Overlay:
  drawing of 17 lines, arcs and shapes, not listed
  text "Top" at 96.99,86.7 h1.52
  text "OpenSource" at 89.3,79.1 h1.2
  text "Hardware" at 97.2,77.5 h1.2
  text "Aeon Lite" at 85,30.8 h0.9
  text "by" at 85,29.5 h0.9
  text "ILoveSpeccy" at 87.3,29.5 h0.9
  text "'2014" at 93,27.9 h0.8
Bottom Overlay:
  text "Bottom" at 104.99,86.7 h1.52

## Text inside footprints (layer, text, board x,y; h text height)
"Gamepad 1": Mechanical 1 "PCB Edge" at 0.9,66.75 h0.25 r90
"Gamepad 2": Mechanical 1 "PCB Edge" at 0.9,49.15 h0.25 r90
Keyboard(Mouse: Mechanical 1 "PCB Edge" at 119.16,41.85 h0.25 r270